# Altium PCB PCB3.PcbDoc (part 2 of 2)
Units mm, origin at the board's own origin, x right, y up, seen from the top; angles counter-clockwise.
Board outline 51.84 x 50.17 mm, 2 copper layers (Top Layer, Bottom Layer); 59 components, 46 nets, 207 pads, 49 vias.
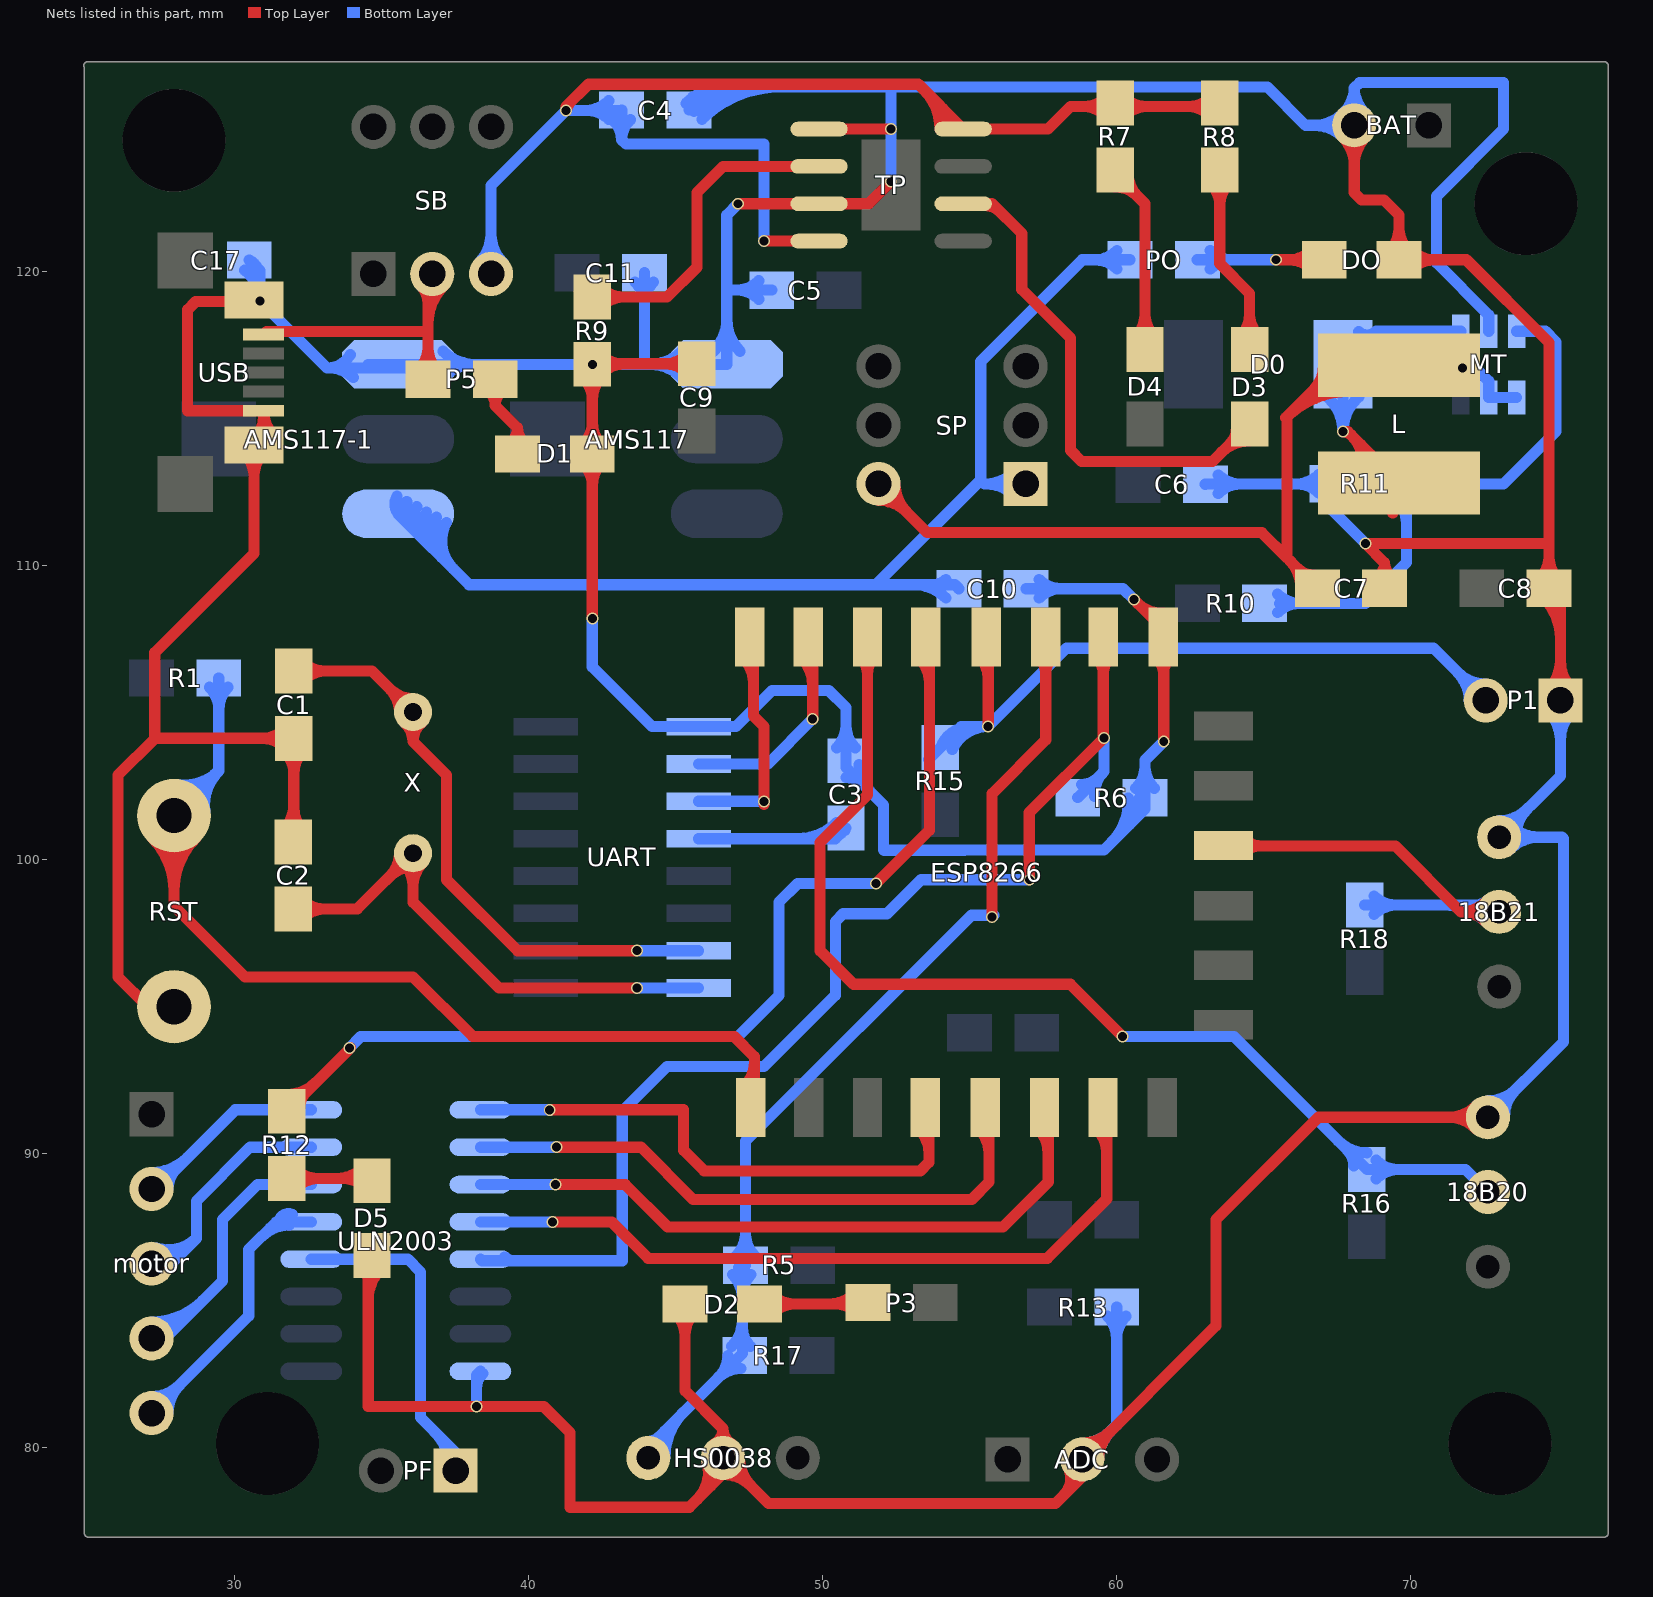
[diagram p2: the nets of this part, all layers, seen from the top]

## Via types
v1: diameter 0.406, hole 0.305, Top Layer to Bottom Layer, 43 vias
v2: diameter 0.66, hole 0.33, Top Layer to Bottom Layer, tented top, 6 vias

## Nets (pads, with @x,y where several pads share a name; then routed paths per layer and width w, separated by ;. In a path a pad name is that pad's centre, name@x,y a point inside that pad or via, vN(x,y) a via of type N, cw(c..) or ccw(c..) an arc to the next point about the centre after c; other vN are vias at no path point) (continued)
GND: 18B20.1 18B21.1 ADC.2 AMS117-1.1 AMS117.1 BAT.2 C1.1 C2.1 C3.2 C4.2 C5.1 C6.1 C7.1 C8.1 C9.1 C10.1 C11.1 C17.1 D1.K D2.K D5.K DO.K ESP8266.15 HS0038.2 MT.2 P1.1 R6.1 R9.1 R11.2 R13.1 RST.1 TP.1 TP.3 UART.1 ULN2003.8 USB.5 | length 397
  Top Layer w0.381: RST.1@27.94,94.996 27.051,94.996 26.035,96.012 26.035,102.87 27.287,104.122 ; USB.5@30.351,113.79 cw(c29.609,113.048) 30.658,113.048 cw(c31.707,113.048) USB.5@30.965,113.79 ; USB.5@30.658,114.097 30.658,110.414 27.287,107.043 27.287,104.122 ; USB.5@30.658,119.024 30.609,118.976 28.679,118.976 28.397,118.694 28.397,115.265 USB.5@30.988,115.265 USB.5@30.988,114.427 ; USB.5@30.726,114.404 ccw(c30.092,115.038) 30.988,115.038 ; USB.5@30.988,115.254 ccw(c32.19,115.254) USB.5@31.34,114.404 ; C2.1@31.68,101.043 ccw(c30.872,101.851) 32.014,101.851 ; C1.1@31.7,103.681 cw(c30.941,102.922) 32.014,102.922 cw(c33.087,102.922) C1.1@32.328,103.681 ; C1.1@31.7,103.808 ccw(c30.941,103.049) 30.941,104.122 ccw(c30.941,105.195) C1.1@31.7,104.436 ; C2.1@31.994,100.602 32.014,100.622 C1.1@32.014,104.122 27.287,104.122 ; 32.014,101.753 ccw(c33.018,101.753) C2.1@32.308,101.043 ; D5.K@34.357,86.096 cw(c33.904,85.644) 34.544,85.644 ; 34.544,85.031 cw(c36.051,85.031) D5.K@34.985,86.096 ; D5.K@34.544,86.36 34.544,81.407 v1(38.227,81.407) 40.513,81.407 41.402,80.518 41.402,77.978 45.466,77.978 46.609,79.121 HS0038.2@46.609,79.654 ; D1.K@41.85,113.478 cw(c41.091,112.719) 42.164,112.719 cw(c43.237,112.719) D1.K@42.478,113.478 ; D1.K@41.85,114.106 ccw(c41.091,114.865) 42.164,114.865 ccw(c43.237,114.865) D1.K@42.478,114.106 ; R9.1@41.85,116.399 cw(c41.091,115.64) 42.164,115.64 cw(c43.237,115.64) R9.1@42.478,116.399 ; v1(42.164,108.204) D1.K@42.164,113.792 v1(42.164,116.84) 42.182,116.858 C9.1@45.71,116.858 ; R9.1@42.478,116.526 cw(c43.28,115.724) 43.28,116.858 ; R9.1@42.478,117.154 ccw(c43.194,117.87) 43.194,116.858 ; D2.K@44.999,84.572 cw(c44.24,83.814) 45.314,83.814 cw(c46.387,83.814) D2.K@45.628,84.572 ; D2.K@45.314,84.887 45.314,81.94 46.609,80.645 ; C9.1@45.396,116.544 ccw(c44.637,115.785) 44.637,116.858 ccw(c44.637,117.931) C9.1@45.396,117.172 ; 45.733,78.245 ccw(c44.811,79.166) HS0038.2@46.069,79.508 ; 46.198,78.71 ccw(c45.542,79.365) HS0038.2@46.437,79.608 ; HS0038.2@46.32,80.134 ccw(c46.012,80.645) 46.609,80.645 ; HS0038.2@46.609,79.095 cw(c46.609,77.744) 47.564,78.699 cw(c48.519,79.654) HS0038.2@47.169,79.654 ; HS0038.2@46.898,80.134 cw(c47.206,80.645) 46.609,80.645 ; v1(47.117,122.301) TP.3@49.874,122.301 51.562,122.301 v1(52.324,123.063) ; TP.1@50.001,124.841 v1(52.324,124.841) ; 58.204,78.397 ccw(c57.648,78.953) ADC.2@58.337,79.333 ; 58.562,78.755 ccw(c58.11,79.208) ADC.2@58.67,79.517 ; ADC.2@58.826,80.163 ccw(c58.826,81.514) 59.782,80.559 ccw(c60.737,79.604) ADC.2@59.386,79.604 ; v1(60.579,108.839) 61.581,107.837 ESP8266.15@61.581,107.567 61.595,107.553 v1(61.595,104.013) ; v1@60.694,108.724 ccw(c61.535,109.565) ESP8266.15@61.571,108.376 ; ESP8266.15@61.362,106.848 cw(c60.799,106.285) 61.595,106.285 ; 61.595,106.354 cw(c62.293,106.354) ESP8266.15@61.8,106.848 ; BAT.2@67.676,124.572 cw(c66.721,123.617) 68.072,123.617 cw(c69.423,123.617) BAT.2@68.468,124.572 ; BAT.2@68.072,124.968 68.072,122.682 68.326,122.428 69.088,122.428 69.596,121.92 DO.K@69.596,120.396 71.882,120.396 74.694,117.584 74.694,110.744 ; C7.1@68.849,109.593 ccw(c68.495,110.091) 69.106,110.091 ; C7.1@69.106,109.23 69.106,110.091 ; DO.K@69.282,120.71 ccw(c68.523,121.469) 69.596,121.469 ccw(c70.669,121.469) DO.K@69.91,120.71 ; C7.1@69.363,109.593 cw(c69.717,110.091) 69.106,110.091 ; DO.K@70.037,120.082 cw(c70.796,119.323) 70.796,120.396 cw(c70.796,121.469) DO.K@70.037,120.71 ; 18B20.1@72.223,90.841 ccw(c71.268,89.886) 71.268,91.237 ccw(c71.268,92.588) 18B20.1@72.223,91.632 ; 18B20.1@72.619,91.237 66.853,91.237 63.373,87.757 63.373,84.15 ADC.2@58.826,79.604 58.801,79.578 58.801,78.994 57.912,78.105 48.158,78.105 HS0038.2@46.609,79.654 ; C8.1@74.38,109.544 ccw(c73.621,110.303) 74.694,110.303 ccw(c75.767,110.303) C8.1@75.008,109.544 ; C8.1@74.507,108.916 cw(c73.116,107.526) 75.082,107.526 ; P1.1@74.687,105.806 ccw(c73.732,106.761) 75.082,106.761 ccw(c76.433,106.761) P1.1@75.478,105.806 ; C8.1@74.776,109.185 cw(c74.036,108.446) 75.082,108.446 ; P1.1@75.082,105.41 75.082,108.842 C8.1@74.694,109.23 74.694,110.744 ; HS0038.2@46.609,79.654 46.609,80.645 ; 69.106,110.091 v1(68.453,110.744) 74.694,110.744
  Bottom Layer w0.381: C17.1@30.349,120.037 cw(c29.511,118.979) v1@30.861,118.979 ; C17.1@30.498,120.386 30.861,120.023 v1(30.861,118.999) 33.147,116.713 ; C17.1@30.585,120.336 cw(c30.135,119.767) C17.1@30.861,119.767 ; 33.254,116.713 cw(c33.254,115.611) AMS117-1.1@34.033,116.39 ; AMS117-1.1@33.936,117.163 cw(c33.147,117.629) 33.147,116.713 ; AMS117-1.1@34.545,116.839 AMS117-1.1@35.562,116.839 43.815,116.839 ; AMS117-1.1@35.814,116.713 33.147,116.713 ; AMS117-1.1@37.09,116.39 cw(c38.174,115.306) 38.174,116.839 cw(c38.174,118.372) AMS117-1.1@37.09,117.288 ; v1(38.227,81.407) 38.227,82.469 ULN2003.8@38.359,82.601 ; 38.227,82.018 cw(c38.941,82.018) ULN2003.8@38.436,82.523 ; v1(42.164,108.204) 42.164,106.553 44.196,104.521 47.05,104.521 48.28,105.751 50.205,105.751 50.79,105.166 C3.2@50.79,103.36 50.79,103.134 52.07,101.854 52.07,100.33 52.083,100.317 54.82,100.317 54.832,100.33 59.563,100.33 60.96,101.727 R6.1@60.96,102.108 60.96,103.378 v1(61.595,104.013) ; C11.1@43.62,119.64 cw(c42.861,118.881) 43.935,118.881 cw(c45.008,118.881) C11.1@44.249,119.64 ; C11.1@43.935,119.954 43.935,116.959 43.815,116.839 ; AMS117.1@45.209,116.39 ccw(c44.125,115.306) 44.125,116.839 ccw(c44.125,118.372) AMS117.1@45.209,117.288 ; C4.2@45.351,125.711 cw(c46.691,124.37) 46.691,126.266 ; C4.2@45.448,125.486 46.228,126.266 ; C4.2@45.575,125.931 ccw(c45.575,126.697) 46.117,126.155 ; C4.2@45.62,125.441 cw(c47.611,123.45) 47.611,126.266 ; C4.2@45.889,125.172 cw(c48.531,122.53) 48.531,126.266 ; C4.2@46.012,125.568 cw(c46.782,125.712) 46.228,126.266 ; AMS117.1@46.289,117.288 ccw(c45.205,118.372) 46.738,118.372 ccw(c48.271,118.372) AMS117.1@47.187,117.288 ; v1(47.117,122.301) 46.738,121.922 46.738,119.38 ; C5.1@47.826,119.05 ccw(c47.067,118.292) 47.067,119.365 ccw(c47.067,120.438) C5.1@47.826,119.679 ; C5.1@48.267,119.365 46.753,119.365 46.738,119.38 ; C3.2@50.476,103.801 ccw(c49.717,104.56) 50.79,104.56 ccw(c51.863,104.56) C3.2@51.104,103.801 ; C3.2@50.79,102.789 cw(c50.79,101.954) 51.38,102.544 ; C3.2@51.234,103.233 ccw(c52.546,103.233) 51.619,102.305 ; v1(52.324,123.063) 52.324,126.238 ; C10.1@56.914,109.21 60.208,109.21 v1(60.579,108.839) ; C10.1@57.355,108.896 cw(c58.114,108.137) 58.114,109.21 cw(c58.114,110.283) C10.1@57.355,109.524 ; ADC.2@58.826,79.604 59.995,80.772 R13.1@59.995,84.785 ; ADC.2@58.826,80.163 ccw(c58.826,81.514) 59.782,80.559 ccw(c60.737,79.604) ADC.2@59.386,79.604 ; R13.1@59.68,84.471 cw(c58.922,83.712) 59.995,83.712 cw(c61.068,83.712) R13.1@60.309,84.471 ; 59.817,100.584 ccw(c58.428,101.973) R6.1@60.389,102.083 ; 60.419,101.186 ccw(c59.568,102.037) R6.1@60.77,102.104 ; R6.1@60.646,102.422 ccw(c59.887,103.181) 60.96,103.181 ccw(c62.033,103.181) R6.1@61.274,102.422 ; C6.1@63.01,112.766 63.02,112.776 R11.2@67.31,112.776 67.31,111.887 ; C6.1@63.451,112.452 cw(c64.235,111.668) 64.235,112.776 ; C6.1@63.451,113.08 ccw(c64.185,113.814) 64.185,112.776 ; R11.2@66.869,112.462 ccw(c66.11,111.703) 66.11,112.776 ccw(c66.11,113.849) R11.2@66.869,113.09 ; R11.2@67.043,112.42 cw(c66.643,111.887) 67.31,111.887 ; R11.2@67.577,112.42 ccw(c67.977,111.887) 67.31,111.887 ; BAT.2@67.676,124.572 ccw(c66.721,123.617) 66.721,124.968 ccw(c66.721,126.319) BAT.2@67.676,125.364 ; BAT.2@67.694,125.381 ccw(c66.911,126.238) 68.072,126.238 ; BAT.2@68.45,125.381 cw(c69.233,126.238) 68.072,126.238 ; v1(68.453,110.744) 67.31,111.887 ; 18B20.1@72.619,91.237 75.184,93.802 75.184,100.711 75.133,100.762 18B21.1@73,100.762 75.082,102.845 P1.1@75.082,105.41 ; 18B20.1@72.619,91.796 ccw(c72.619,93.147) 73.574,92.192 ccw(c74.529,91.237) 18B20.1@73.178,91.237 ; MT.2@72.644,117.965 72.644,118.519 70.866,120.297 70.866,122.555 73.152,124.841 73.152,126.428 68.263,126.428 68.072,126.238 ; 18B21.1@73,101.321 ccw(c73,102.672) 73.955,101.717 ccw(c74.91,100.762) 18B21.1@73.559,100.762 ; 18B21.1@73.395,100.366 cw(c74.35,99.411) 74.35,100.762 cw(c74.35,102.113) 18B21.1@73.395,101.157 ; P1.1@74.687,105.014 cw(c73.732,104.059) 75.082,104.059 cw(c76.433,104.059) P1.1@75.478,105.014 ; 43.815,116.839 AMS117.1@46.738,116.839 46.738,119.38 ; 46.228,126.266 65.123,126.266 66.421,124.968 BAT.2@68.072,124.968 68.072,126.238
GPIO00: ESP8266.18 P1.2 R15.2 | length 29.7
  Top Layer w0.381: ESP8266.18@55.342,106.848 cw(c54.656,106.162) 55.626,106.162 ; v1(55.626,104.521) 55.626,106.87 ESP8266.18@55.688,106.932 ; 55.626,106.478 cw(c56.15,106.478) ESP8266.18@55.78,106.848
  Bottom Layer w0.381: R15.2@53.594,103.403 R15.2@54,103.81 54.712,104.521 v1(55.626,104.521) ; R15.2@54.058,103.91 cw(c55.024,103.452) 55.024,104.521 ; R15.2@54.402,103.747 cw(c55.626,103.167) v1(55.626,104.521) ; P1.2@71.983,105.41 ccw(c70.632,105.41) 71.587,106.365 ccw(c72.542,107.32) P1.2@72.542,105.969 ; P1.2@72.542,105.41 70.764,107.188 58.293,107.188 v1(55.626,104.521)
GPIO02: ESP8266.17 HS0038.1 R5.2 R17.1 | length 45
  Top Layer w0.381: v1(55.753,98.044) 55.753,102.235 57.581,104.063 ESP8266.17@57.581,107.567 ; ESP8266.17@57.362,106.848 cw(c56.833,106.32) 57.581,106.32 cw(c58.328,106.32) ESP8266.17@57.8,106.848
  Bottom Layer w0.381: HS0038.1@44.069,79.654 44.069,80.01 47.269,83.21 47.269,86.004 R5.2@47.142,86.131 ; HS0038.1@44.069,80.214 ccw(c44.069,80.706) 44.417,80.358 ; HS0038.1@44.248,79.654 cw(c45.537,79.654) 44.625,80.566 ; HS0038.1@44.629,79.654 cw(c46.838,79.654) 45.276,81.217 ; 46.416,82.357 cw(c47.219,81.555) R17.1@47.219,82.69 ; 46.478,82.419 ccw(c45.762,83.134) R17.1@46.774,83.134 ; R17.1@46.904,83.449 ccw(c46.023,84.33) 47.269,84.33 ; R5.2@46.93,85.893 cw(c46.11,85.073) 47.269,85.073 ; R5.2@47.057,86.522 ccw(c46.298,87.281) 47.371,87.281 ccw(c48.444,87.281) R5.2@47.685,86.522 ; 47.269,84.085 ccw(c48.169,84.085) R17.1@47.533,83.449 ; 47.269,85.196 cw(c48.256,85.196) R5.2@47.558,85.893 ; R5.2@47.371,86.208 47.371,90.424 55.054,98.108 v1@55.816,98.108
GPIO04: ESP8266.19 R12.2 | length 36.2
  Top Layer w0.381: R12.2@31.775,91.44 v1@33.934,93.599 ; R12.2@31.775,92.011 ccw(c31.775,93.391) 32.751,92.416 ; R12.2@32.22,91.567 cw(c32.986,91.567) 32.444,92.109 ; v1(51.816,99.187) 53.628,100.999 ESP8266.19@53.628,106.932 ; ESP8266.19@53.282,106.848 cw(c52.447,106.013) 53.628,106.013
  Bottom Layer w0.381: v1(33.909,93.599) 34.29,93.98 47.117,93.98 48.514,95.377 48.514,98.552 49.149,99.187 v1(51.816,99.187)
GPIO05: 18B20.2 ESP8266.20 R16.1 | length 42
  Top Layer w0.381: ESP8266.20@51.302,106.848 cw(c50.773,106.32) 51.521,106.32 cw(c52.268,106.32) ESP8266.20@51.74,106.848 ; ESP8266.20@51.521,107.567 51.521,102.194 49.911,100.584 49.911,96.901 51.054,95.758 58.42,95.758 v1(60.198,93.98)
  Bottom Layer w0.381: v1(60.198,93.98) 63.983,93.98 R16.1@68.504,89.459 71.857,89.459 18B20.2@72.619,88.697 ; 67.528,90.434 ccw(c68.504,91.41) R16.1@68.504,90.03 ; 67.835,90.128 cw(c67.293,89.586) R16.1@68.059,89.586 ; R16.1@68.818,89.144 cw(c69.577,88.386) 69.577,89.459 cw(c69.577,90.532) R16.1@68.818,89.773
GPIO10: 18B21.2 ESP8266.12 R18.1 | length 23.4
  Top Layer w0.381: ESP8266.12@63.627,100.477 63.647,100.457 69.469,100.457 71.704,98.222 ; ESP8266.12@64.346,100.258 cw(c64.826,99.778) 64.826,100.457 ; ESP8266.12@64.346,100.696 ccw(c64.922,101.272) 64.922,100.457 ; 18B21.2@72.592,97.838 ccw(c71.704,97.002) 71.704,98.222 ; 18B21.2@72.592,98.605 cw(c71.704,99.442) 71.704,98.222 ; 18B21.2@72.624,98.597 18B21.2@73,98.222 71.704,98.222
  Bottom Layer w0.381: R18.1@68.428,98.45 72.771,98.45 18B21.2@73,98.222 ; R18.1@68.742,98.136 cw(c69.501,97.377) 69.501,98.45 cw(c69.501,99.524) R18.1@68.742,98.765 ; 71.097,98.45 cw(c71.097,96.319) 18B21.2@72.604,97.826 ; 72.017,98.45 cw(c72.017,97.239) 18B21.2@72.873,98.096 ; 72.201,98.45 ccw(c72.201,99.021) 18B21.2@72.604,98.617
GPIO12: ESP8266.6 ULN2003.3 | length 23.4
  Top Layer w0.381: v1(40.919,88.951) 43.282,88.951 44.729,87.503 56.134,87.503 57.668,89.037 ESP8266.6@57.668,90.932 ; ESP8266.6@57.322,90.848 cw(c56.487,90.013) 57.668,90.013
  Bottom Layer w0.381: ULN2003.3@38.359,88.951 v1(40.919,88.951) v1@40.945,88.951
GPIO13: ESP8266.7 ULN2003.4 | length 26.1
  Top Layer w0.381: v1(40.818,87.681) 42.824,87.681 44.069,86.436 57.633,86.436 59.658,88.461 ESP8266.7@59.658,90.932 ; ESP8266.7@59.312,90.848 cw(c58.477,90.013) 59.658,90.013
  Bottom Layer w0.381: ULN2003.4@38.359,87.681 v1(40.818,87.681)
GPIO14: ESP8266.5 ULN2003.2 | length 21.1
  Top Layer w0.381: v1(40.945,90.221) 43.815,90.221 45.593,88.443 55.067,88.443 55.658,89.033 ESP8266.5@55.658,90.932 ; ESP8266.5@55.312,90.848 cw(c54.477,90.013) 55.658,90.013
  Bottom Layer w0.381: ULN2003.2@38.359,90.221 v1(40.945,90.221) v1@40.97,90.221
GPIO15: ESP8266.16 R6.2 ULN2003.5 | length 43.3
  Top Layer w0.381: v1(57.023,99.314) 57.023,101.6 59.541,104.118 ESP8266.16@59.541,107.567 ; ESP8266.16@59.322,106.848 cw(c58.793,106.32) 59.541,106.32 cw(c60.288,106.32) ESP8266.16@59.76,106.848
  Bottom Layer w0.381: ULN2003.5@38.359,86.411 38.41,86.36 43.18,86.36 43.18,91.44 44.704,92.964 48.006,92.964 50.432,95.39 50.432,97.898 50.692,98.158 52.184,98.158 53.34,99.314 v1(57.023,99.314) ; ULN2003.5@39.186,86.488 ccw(c39.496,86.798) 39.496,86.36 ; R6.2@58.674,102.108 59.563,102.997 ; R6.2@58.801,102.552 ccw(c58.801,103.319) 59.343,102.777 ; R6.2@59.244,102.14 cw(c60.339,102.221) 59.563,102.997 ; v1(59.563,104.14) 59.563,102.997
GPIO16: ESP8266.4 ULN2003.1 | length 19.2
  Top Layer w0.381: v1(40.716,91.491) 45.263,91.491 45.263,90.119 45.974,89.408 53.315,89.408 53.618,89.711 ESP8266.4@53.618,90.932 ; ESP8266.4@53.272,90.848 cw(c52.437,90.013) 53.618,90.013
  Bottom Layer w0.381: ULN2003.1@38.359,91.491 v1(40.716,91.491)
MPINA: motor.2 ULN2003.16 | length 8.4
  Bottom Layer w0.381: motor.2@27.178,89.358 ccw(c27.178,91.077) 28.393,89.861 ; motor.2@27.61,88.773 27.61,89.078 30.023,91.491 ULN2003.16@32.609,91.491 ; motor.2@27.737,88.798 cw(c28.72,88.798) 28.025,89.493
MPINB: motor.3 ULN2003.15 | length 10
  Bottom Layer w0.381: motor.3@27.232,86.429 ccw(c27.54,87.398) 28.259,86.679 ; motor.3@27.347,86.792 ccw(c27.753,88.071) 28.702,87.122 ; motor.3@27.61,86.233 27.813,86.233 28.702,87.122 ; ULN2003.15@32.609,90.221 30.531,90.221 28.702,88.392 28.702,87.122
MPINC: motor.4 ULN2003.14 | length 11.5
  Bottom Layer w0.381: motor.4@27.178,83.897 ccw(c27.178,85.432) 28.263,84.346 ; motor.4@27.178,84.278 ccw(c27.178,86.732) 28.914,84.997 ; motor.4@27.61,83.693 29.591,85.674 29.591,87.757 30.785,88.951 ULN2003.14@32.609,88.951
MPIND: motor.5 ULN2003.13 | length 14
  Bottom Layer w0.381: motor.5@27.178,81.178 30.48,84.48 30.48,86.741 31.42,87.681 ULN2003.13@32.609,87.681 ; motor.5@27.178,81.738 ccw(c27.178,83.089) 28.133,82.134 ccw(c29.088,81.178) motor.5@27.737,81.178 ; 30.922,87.183 cw(c31.859,86.247) ULN2003.13@31.859,87.571 ; 31.2,87.461 cw(c31.596,87.066) ULN2003.13@31.816,87.58 ; 31.573,87.834 cw(c31.859,87.548) ULN2003.13@31.859,87.952 ; 31.599,87.86 cw(c31.834,87.624) ULN2003.13@31.966,87.93
MPINF: PF.1 ULN2003.12 | length 12.6
  Bottom Layer w0.381: ULN2003.12@32.609,86.411 34.366,86.411 35.89,86.411 36.322,85.979 36.322,81.026 37.516,79.832 PF.1@37.516,79.223 ; 36.78,80.568 cw(c35.435,79.223) PF.1@37.337,79.223
NetC1_2: C1.2 UART.7 X.2 | length 25.3
  Top Layer w0.381: C1.2@32.014,106.408 34.676,106.408 X.2@36.068,105.016 36.068,104.013 ; C1.2@32.328,106.094 cw(c33.087,105.335) 33.087,106.408 cw(c33.087,107.481) C1.2@32.328,106.722 ; X.2@35.609,105.016 ccw(c34.499,105.016) 35.284,105.8 ccw(c36.068,106.585) X.2@36.068,105.475 ; X.2@35.768,104.668 cw(c35.203,104.013) 36.068,104.013 ; X.2@36.368,104.668 ccw(c36.933,104.013) 36.068,104.013 ; v1(43.688,96.901) 39.624,96.901 37.211,99.314 37.211,102.87 36.068,104.013
  Bottom Layer w0.381: v1(43.688,96.901) UART.7@45.78,96.901
NetC2_2: C2.2 UART.8 X.1 | length 22.6
  Top Layer w0.381: C2.2@31.994,98.316 34.168,98.316 X.1@36.068,100.216 36.068,98.552 38.989,95.631 v1(43.688,95.631) ; C2.2@32.308,98.002 cw(c33.067,97.243) 33.067,98.316 cw(c33.067,99.389) C2.2@32.308,98.63 ; X.1@35.609,100.216 cw(c34.499,100.216) 35.284,99.432 cw(c36.068,98.647) X.1@36.068,99.757 ; X.1@35.743,99.891 cw(c34.959,99.107) 36.068,99.107 cw(c37.177,99.107) X.1@36.393,99.891
  Bottom Layer w0.381: v1(43.688,95.631) UART.8@45.78,95.631
NetC3_1: C3.1 UART.4 | length 7.4
  Bottom Layer w0.381: UART.4@45.78,100.711 50.427,100.711 C3.1@50.79,101.074 ; 49.147,100.711 ccw(c49.147,102.59) C3.1@50.476,101.261 ; 50.067,100.711 ccw(c50.067,101.67) C3.1@50.745,100.992
NetD0_A: D0.A L.2 MT.1 | length 29.6
  Top Layer w0.381: v1@67.691,114.541 cw(c67.691,114.127) 67.984,114.42 ; v1(67.691,114.554) 67.85,114.554 L.2@69.596,112.808 ; 67.977,114.427 cw(c67.001,113.45) L.2@68.133,112.66 ; 68.299,114.105 cw(c67.379,113.186) L.2@68.445,112.442 ; L.2@68.62,113.784 cw(c67.758,112.922) L.2@68.758,112.224 ; L.2@68.942,113.462 cw(c68.137,112.657) L.2@69.07,112.006 ; L.2@69.263,113.141 cw(c68.515,112.393) L.2@69.383,111.788
  Bottom Layer w0.381: D0.A@67.157,115.731 cw(c66.126,114.554) v1(67.691,114.554) ; D0.A@67.725,117.306 cw(c69.315,115.716) 69.315,117.965 ; D0.A@67.994,117.037 cw(c70.234,114.797) 70.234,117.965 ; D0.A@68.225,115.731 ccw(c69.256,114.554) v1(67.691,114.554) ; D0.A@68.227,117.947 ccw(c68.512,118.269) 68.816,117.965 ; D0.A@68.263,116.768 cw(c71.154,113.877) 71.154,117.965 ; D0.A@68.5,117.34 cw(c69.248,117.34) 68.719,117.868 ; MT.1@71.694,117.965 68.816,117.965 ; v1(67.691,114.554) D0.A@67.691,116.84 68.816,117.965
NetD1_A: D1.A P5.2 | length 5.3
  Top Layer w0.381: P5.2@38.595,115.976 cw(c38.195,115.443) 38.862,115.443 ; P5.2@38.862,116.332 38.862,115.443 ; P5.2@39.129,115.976 ccw(c39.529,115.443) 38.862,115.443 ; D1.A@39.357,114.148 ccw(c38.957,114.681) 39.624,114.681 ; D1.A@39.624,113.792 39.624,114.681 ; D1.A@39.891,114.148 cw(c40.291,114.681) 39.624,114.681 ; 38.862,115.443 39.624,114.681
NetD2_A: D2.A P3.2 | length 7.1
  Top Layer w0.381: D2.A@47.854,84.887 51.486,84.887 P3.2@51.537,84.938 ; D2.A@48.295,84.572 cw(c49.054,83.814) 49.054,84.887 cw(c49.054,85.96) D2.A@48.295,85.201 ; 50.214,84.887 ccw(c50.214,86.133) P3.2@51.095,85.252 ; 50.459,84.887 cw(c50.459,83.987) P3.2@51.095,84.623
NetD3_A: D3.A R8.1 | length 9.6
  Top Layer w0.381: R8.1@63.186,123.003 cw(c62.427,122.244) 63.5,122.244 cw(c64.573,122.244) R8.1@63.814,123.003 ; R8.1@63.5,123.19 63.5,120.269 64.516,119.253 D3.A@64.516,117.348 ; D3.A@64.202,117.789 ccw(c63.443,118.548) 64.516,118.548 ccw(c65.589,118.548) D3.A@64.83,117.789
NetD4_A: D4.A R7.1 | length 9.8
  Top Layer w0.381: R7.1@59.944,122.872 cw(c59.944,121.799) 60.703,122.558 cw(c61.462,123.317) R7.1@60.389,123.317 ; R7.1@59.944,123.317 60.96,122.301 D4.A@60.96,117.348 ; D4.A@60.646,117.789 ccw(c59.887,118.548) 60.96,118.548 ccw(c62.033,118.548) D4.A@61.274,117.789
NetD5_A: D5.A R12.1 | length 6.5
  Top Layer w0.381: R12.1@31.648,89.027 R12.1@31.775,89.154 34.595,89.154 D5.A@34.671,89.078 ; R12.1@32.09,88.84 cw(c32.849,88.081) 32.849,89.154 cw(c32.849,90.227) R12.1@32.09,89.468 ; 33.475,89.154 ccw(c33.475,90.401) D5.A@34.357,89.519 ; 33.721,89.154 cw(c33.721,88.254) D5.A@34.357,88.89
NetDO_A: DO.A PO.2 | length 7.7
  Top Layer w0.381: v1(65.405,120.396) DO.A@67.056,120.396 ; DO.A@66.615,120.082 ccw(c65.856,119.323) 65.856,120.396 ccw(c65.856,121.469) DO.A@66.615,120.71
  Bottom Layer w0.381: PO.2@62.738,120.396 v1(65.405,120.396) ; PO.2@63.179,120.082 cw(c63.938,119.323) 63.938,120.396 cw(c63.938,121.469) PO.2@63.179,120.71
NetMT_3: MT.3 R10.1 R11.1 | length 23.7
  Bottom Layer w0.381: R10.1@65.465,108.398 cw(c66.224,107.639) 66.224,108.712 cw(c66.224,109.785) R10.1@65.465,109.026 ; R10.1@65.532,108.712 68.453,108.712 69.85,110.109 69.85,112.522 R11.1@69.596,112.776 ; R11.1@69.409,112.462 cw(c68.343,111.396) 69.85,111.396 ; R11.1@69.596,113.118 R11.1@69.596,112.776 ; 69.85,112.009 cw(c70.49,112.009) 70.037,112.462 cw(c70.796,111.703) 70.796,112.776 cw(c70.796,113.849) R11.1@70.037,113.09 ; MT.3@73.594,117.965 74.567,117.965 74.93,117.602 74.93,114.554 73.152,112.776 R11.1@69.596,112.776
NetR9_2: R9.2 TP.2 | length 12.7
  Top Layer w0.381: R9.2@42.164,119.126 44.704,119.126 45.72,120.142 45.72,122.682 46.609,123.571 TP.2@49.874,123.571 ; R9.2@42.478,118.812 cw(c43.237,118.053) 43.237,119.126 cw(c43.237,120.199) R9.2@42.478,119.44
RST: ESP8266.1 R1.1 RST.3 | length 46.8
  Top Layer w0.381: RST.3@27.191,100.747 cw(c25.382,98.938) 27.94,98.938 cw(c30.498,98.938) RST.3@28.689,100.747 ; RST.3@27.46,101.016 cw(c26.302,99.858) 27.94,99.858 cw(c29.578,99.858) RST.3@28.42,101.016 ; RST.3@27.94,101.496 27.94,98.425 30.353,96.012 36.068,96.012 38.1,93.98 46.99,93.98 47.678,93.292 ESP8266.1@47.678,90.932 ; ESP8266.1@47.332,92.286 ccw(c46.497,93.121) 47.678,93.121
  Bottom Layer w0.381: RST.3@27.94,101.496 29.464,103.02 ; RST.3@28.027,102.169 ccw(c28.163,103.225) 28.916,102.472 ccw(c29.669,101.719) RST.3@28.613,101.583 ; RST.3@28.076,102.547 ccw(c28.289,104.195) 29.464,103.02 ; RST.3@28.991,101.632 cw(c30.639,101.845) 29.464,103.02 ; R1.1@29.15,105.858 cw(c28.391,105.099) 29.464,105.099 cw(c30.537,105.099) R1.1@29.778,105.858 ; R1.1@29.464,106.172 29.464,103.02
RXD: ESP8266.22 UART.3 | length 8.4
  Top Layer w0.381: ESP8266.22@47.302,106.848 cw(c46.467,106.013) 47.648,106.013 ; ESP8266.22@47.648,106.932 47.648,104.879 48.006,104.521 v1(48.006,101.981) v1@48.006,101.879
  Bottom Layer w0.381: UART.3@45.78,101.981 v1(48.006,101.981)
SBAT+: C7.2 L.1 MT.4 MT.5 SP.6 | length 36.8
  Top Layer w0.381: SP.6@51.896,112.217 cw(c51.896,110.866) 52.851,111.821 cw(c53.806,112.776) SP.6@52.455,112.776 ; SP.6@51.896,112.776 53.547,111.125 64.925,111.125 65.786,110.264 65.786,115.062 67.532,116.808 L.1@69.596,116.808 ; 65.747,115.023 cw(c67.921,112.849) L.1@67.921,115.924 ; 65.878,110.172 cw(c64.981,109.276) C7.2@66.249,109.242 ; 65.941,110.109 C7.2@66.82,109.23 ; 66.151,109.899 ccw(c66.693,110.441) C7.2@66.693,109.675 ; 66.397,115.673 cw(c67.921,114.15) L.1@67.921,116.305 ; 66.686,115.962 ccw(c65.84,116.808) L.1@67.037,116.808
  Bottom Layer w0.381: v1@71.882,116.734 72.178,116.734 72.644,116.269 MT.5@72.644,115.715 MT.4@73.594,115.715
  other v1: 71.755,116.713
STDBY: D3.K TP.6 | length 20.4
  Top Layer w0.381: TP.6@55.211,122.301 TP.6@54.774,122.301 55.753,122.301 56.769,121.285 56.769,119.38 58.42,117.729 58.42,113.919 58.801,113.538 63.246,113.538 D3.K@64.516,114.808 ; TP.6@55.499,122.242 cw(c55.499,121.485) 56.034,122.02 ; TP.6@55.522,122.246 cw(c55.647,121.941) 55.88,122.174 ; 63.54,113.832 cw(c64.516,112.857) D3.K@64.516,114.236 ; 63.847,114.139 ccw(c63.305,114.681) D3.K@64.072,114.681
TXD: ESP8266.21 UART.2 | length 7.5
  Top Layer w0.381: ESP8266.21@49.282,106.848 cw(c48.376,105.942) 49.657,105.942 ; v1(49.657,104.775) ESP8266.21@49.657,106.805
  Bottom Layer w0.381: UART.2@45.78,103.251 48.133,103.251 v1(49.657,104.775)
VCC: AMS117-1.3 C10.2 PO.1 SP.1 | length 50
  Bottom Layer w0.381: AMS117-1.3@35.521,112.358 ccw(c36.012,112.096) AMS117-1.3@35.618,111.702 ; AMS117-1.3@35.562,111.759 37.974,109.347 51.816,109.347 ; AMS117-1.3@35.857,112.179 ccw(c36.485,111.843) AMS117-1.3@35.982,111.339 ; AMS117-1.3@36.193,111.999 ccw(c36.958,111.59) AMS117-1.3@36.345,110.976 ; AMS117-1.3@36.529,111.819 ccw(c37.431,111.336) 36.708,110.613 ; AMS117-1.3@36.865,111.639 ccw(c37.904,111.083) 37.071,110.25 ; AMS117-1.3@37.201,111.46 ccw(c38.377,110.83) 37.434,109.887 ; 53.097,109.347 cw(c53.097,107.806) C10.2@54.187,108.896 ; 53.759,109.347 ccw(c53.759,109.952) C10.2@54.187,109.524 ; C10.2@54.628,109.21 54.491,109.347 51.816,109.347 ; SP.1@56.5,112.38 ccw(c55.545,111.425) 55.545,112.776 ccw(c55.545,114.127) SP.1@56.5,113.172 ; SP.1@56.896,112.776 55.499,112.776 55.372,112.903 ; PO.1@60.011,120.082 ccw(c59.252,119.323) 59.252,120.396 ccw(c59.252,121.469) PO.1@60.011,120.71 ; PO.1@60.452,120.396 58.827,120.396 55.372,116.941 55.372,112.903 ; 51.816,109.347 55.372,112.903
VCCIN: P5.1 SB.2 USB.1 | length 14
  Top Layer w0.381: USB.1@30.988,117.856 31.087,117.955 36.515,117.955 36.576,117.894 ; P5.1@36.262,116.646 ccw(c35.503,117.405) 36.576,117.405 ccw(c37.649,117.405) P5.1@36.89,116.646 ; SB.2@36.326,119.518 cw(c35.723,118.915) 36.576,118.915 ; P5.1@36.576,116.332 36.576,117.894 ; 36.576,118.211 cw(c38.425,118.211) SB.2@37.117,119.518 ; 36.576,119.13 cw(c37.505,119.13) SB.2@36.848,119.787 ; SB.2@36.722,119.785 SB.2@36.722,119.913 36.576,119.768 36.576,117.894
VCCO1: C4.1 R7.2 R8.2 SB.3 TP.4 TP.8 | length 56
  Top Layer w0.381: v1(41.275,125.476) 41.275,125.603 42.037,126.365 53.25,126.365 TP.8@54.774,124.841 57.658,124.841 58.42,125.603 R8.2@63.373,125.603 ; v1@41.288,125.476 cw(c41.625,125.476) 41.386,125.714 ; v1(48.006,121.031) TP.4@49.874,121.031 ; 53.435,126.18 cw(c52.096,124.841) TP.8@53.99,124.841 ; 54.085,125.53 cw(c53.396,124.841) TP.8@54.371,124.841 ; TP.8@54.736,124.879 cw(c54.697,124.841) TP.8@54.752,124.841 ; R7.2@59.63,125.289 ccw(c58.871,124.53) 58.871,125.603 ccw(c58.871,126.676) R7.2@59.63,125.917 ; R7.2@60.258,125.289 cw(c61.017,124.53) 61.017,125.603 cw(c61.017,126.676) R7.2@60.258,125.917 ; R8.2@63.186,125.289 ccw(c62.427,124.53) 62.427,125.603 ccw(c62.427,126.676) R8.2@63.186,125.917
  Bottom Layer w0.381: SB.3@38.326,120.309 ccw(c37.371,121.264) 38.722,121.264 ccw(c40.073,121.264) SB.3@39.117,120.309 ; SB.3@38.722,119.913 38.722,122.917 38.718,122.92 v1(41.275,125.476) ; v1(41.275,125.476) 43.152,125.476 C4.1@43.162,125.486 43.162,124.478 ; 41.937,125.476 ccw(c41.937,126.584) C4.1@42.721,125.8 ; 41.987,125.476 cw(c41.987,124.438) C4.1@42.721,125.172 ; C4.1@42.862,125.158 cw(c42.241,124.478) 43.162,124.478 ; C4.1@43.462,125.158 ccw(c44.083,124.478) 43.162,124.478 ; v1(48.006,121.031) 48.006,124.333 43.307,124.333 43.162,124.478
pads on no net: ESP8266.9 ESP8266.10 ESP8266.11 ESP8266.13 ESP8266.14 MT.6 SB.4 SB.5 SB.6 SP.3 SP.4 TP.9 UART.9 UART.10 UART.11 UART.12 UART.13 UART.14 UART.15 ULN2003.6 ULN2003.7 ULN2003.10 ULN2003.11 USB.0 USB.4
copper on no net:
  other v2: 51.724,121.736 52.924,121.736 51.724,122.936 52.924,122.936 51.724,124.136 52.924,124.136

## Keep-outs
Keep-Out Layer:
  lines w0.254: 25,127 74.803,127 ; 25.019,77.948 25.019,127 ; 25.019,78.232 25.019,77.089 76.581,77.089 76.581,127 74.803,127 ; 75,127 74.803,127

## Other copper
Bottom Layer:
  rectangle net GND: 72.263,124.206 75.438,126.238
  rectangle net GND: 66.04,125.984 75.438,126.746

## Silkscreen, mask and mechanical layers (free items; w line width, h text height)
Mechanical 1:
  lines w0.254: 3.913,127.056 13.461,127.056 ; 4.327,128.616 4.836,127.092 ; 4.33,110.999 4.838,112.523 ; 4.365,112.523 21.104,112.523 ; 4.582,127.092 5.09,127.092 ; 4.584,112.523 5.092,112.523 ; 4.835,129.632 4.836,127.092 ; 4.838,109.983 4.838,112.523 ; 5.343,128.616 4.836,127.092 ; 5.346,110.999 4.838,112.523 ; 7.171,119.193 7.7,120.71 ; 7.302,128.586 7.789,127.055 ; 7.329,120.703 26.003,120.703 ; 7.446,120.714 7.954,120.706 ; 7.535,127.059 8.043,127.051 ; 7.664,118.17 7.7,120.71 ; 7.824,129.595 7.789,127.055 ; 8.186,119.179 7.7,120.71 ; 8.318,128.572 7.789,127.055 ; 13.252,125.927 33.403,125.927 ; 13.301,124.365 13.809,125.889 ; 13.301,128.614 13.809,127.09 ; 13.406,127.032 21.137,127.032 ; 13.555,125.889 14.063,125.889 ; 13.555,127.09 14.063,127.09 ; 13.809,123.349 13.809,125.889 ; 13.809,129.63 13.809,127.09 ; 14.317,124.365 13.809,125.889 ; 14.317,128.614 13.809,127.09 ; 19.188,123.026 19.696,124.55 ; 19.188,128.636 19.696,127.112 ; 19.254,124.553 28.01,124.553 ; 19.442,124.55 19.95,124.55 ; 19.442,127.112 19.95,127.112 ; 19.696,122.01 19.696,124.55 ; 19.696,129.652 19.696,127.112 ; 20.204,123.026 19.696,124.55 ; 20.204,128.636 19.696,127.112 ; 20.913,112.495 25.939,112.495 ; 21.085,127.037 25.091,127.037 ; 22.538,145.762 25.077,145.719 ; 22.557,139.626 25.097,139.645 ; 23.545,145.237 25.077,145.719 ; 23.562,146.253 25.077,145.719 ; 23.569,140.141 25.097,139.645 ; 23.577,139.125 25.097,139.645 ; 25.057,130.626 25.057,147.02 ; 25.06,127.037 25.06,130.701 ; 25.073,145.465 25.082,145.973 ; 25.095,139.899 25.099,139.391 ; 27.979,124.521 27.979,141.916 ; 28.011,139.921 28.015,139.413 ; 29.533,140.187 28.013,139.667 ; 29.541,139.171 28.013,139.667 ; 30.553,139.687 28.013,139.667 ; 30.742,132.633 33.282,132.633 ; 31.758,132.125 33.282,132.633 ; 31.758,133.141 33.282,132.633 ; 33.282,125.988 33.282,146.653 ; 33.282,132.379 33.282,132.887 ; 33.316,145.324 33.325,145.832 ; 34.835,145.044 33.32,145.578 ; 34.853,146.06 33.32,145.578 ; 35.86,145.534 33.32,145.578 ; 40.213,132.379 40.213,132.887 ; 40.236,139.757 40.241,126.048 ; 41.737,132.125 40.213,132.633 ; 41.737,133.141 40.213,132.633 ; 42.753,132.633 40.213,132.633 ; 48.275,130.977 50.815,130.991 ; 49.288,131.491 50.815,130.991 ; 49.294,130.475 50.815,130.991 ; 50.785,118.282 50.785,131.484 ; 50.813,131.245 50.816,130.737 ; 57.896,131.283 57.899,130.775 ; 57.917,118.251 57.917,131.358 ; 57.917,118.398 87.132,118.398 ; 57.991,111.295 86.913,111.295 ; 59.419,131.545 57.897,131.029 ; 59.424,130.529 57.897,131.029 ; 60.437,131.043 57.897,131.029 ; 70.496,75.062 73.036,75.025 ; 71.505,74.539 73.036,75.025 ; 71.52,75.555 73.036,75.025 ; 73.032,74.771 73.04,75.279 ; 73.046,73.606 73.046,80.115 ; 73.147,80.103 104.559,80.103 ; 76.514,127.005 99.741,127.005 ; 76.598,73.489 76.598,77.152 86.881,77.152 ; 76.601,74.718 76.609,75.226 ; 77.957,116.88 78.47,118.403 ; 77.99,128.55 78.494,127.024 ; 78.121,74.442 76.605,74.972 ; 78.136,75.457 76.605,74.972 ; 78.216,118.404 78.724,118.402 ; 78.24,127.025 78.748,127.023 ; 78.463,115.863 78.47,118.403 ; 78.501,129.564 78.494,127.024 ; 78.973,116.878 78.47,118.403 ; 79.006,128.547 78.494,127.024 ; 79.145,74.935 76.605,74.972 ; 80.567,75.642 81.112,77.153 ; 80.714,81.656 81.185,80.12 ; 80.858,77.159 81.366,77.147 ; 80.931,80.126 81.438,80.114 ; 81.05,74.614 81.112,77.153 ; 81.247,82.659 81.185,80.12 ; 81.583,75.617 81.112,77.153 ; 81.73,81.631 81.185,80.12 ; 84.365,109.771 84.905,111.284 ; 84.575,119.847 85.051,118.313 ; 84.651,111.289 85.159,111.279 ; 84.798,118.318 85.305,118.308 ; 84.852,108.745 84.905,111.284 ; 85.104,120.853 85.051,118.313 ; 85.381,109.75 84.905,111.284 ; 85.591,119.826 85.051,118.313 ; 95.056,81.676 95.548,80.146 ; 95.294,80.149 95.802,80.144 ; 95.514,125.44 96.038,126.958 ; 95.695,94.132 95.548,80.146 ; 95.784,126.961 96.292,126.956 ; 95.892,112.972 96.038,126.958 ; 96.072,81.665 95.548,80.146 ; 96.53,125.429 96.038,126.958
  text "8.24425 (mm)" at 20.606,142.138 h1.52 r359.02
  text "2.91618 (mm)" at 18.305,135.936 h1.52 r0.44
  text "14.56909 (mm)" at 1.179,128.973 h1.52 r270.01
  text "6.93143 (mm)" at 28.343,128.976 h1.52
  text "7.08269 (mm)" at 45.844,127.308 h1.52 r0.31
  text "1.20025 (mm)" at 17.466,118.085 h1.52 r90
  text "2.56167 (mm)" at 23.353,117.426 h1.52 r90
  text "6.34564 (mm)" at 11.281,115.3 h1.52 r89.2
  text "8.62115 (mm)" at 82.115,114.426 h1.52 r89.84
  text "7.03065 (mm)" at 88.456,106.193 h1.52 r88.81
  text "46.81464 (mm)" at 96.611,94.377 h1.52 r89.4
  text "3.56924 (mm)" at 66.236,71.468 h1.52 r359.15
  text "2.96788 (mm)" at 84.596,70.018 h1.52 r88.6

## Text inside footprints (layer, text, board x,y; h text height)
AMS117: Bottom Overlay "1" at 42.343,116.992 h1.27 r90; Bottom Overlay "3" at 42.343,112.42 h1.27 r90
AMS117-1: Bottom Overlay "1" at 31.167,116.992 h1.27 r90; Bottom Overlay "3" at 31.167,112.42 h1.27 r90